# Altium PCB Analog_readout_v2.PcbDoc
Units mm, origin at the board's own origin, x right, y up, seen from the top; angles counter-clockwise.
Board outline 82.42 x 81.05 mm, 2 copper layers (Top Layer, Bottom Layer); 87 components, 48 nets, 227 pads, 13 vias.
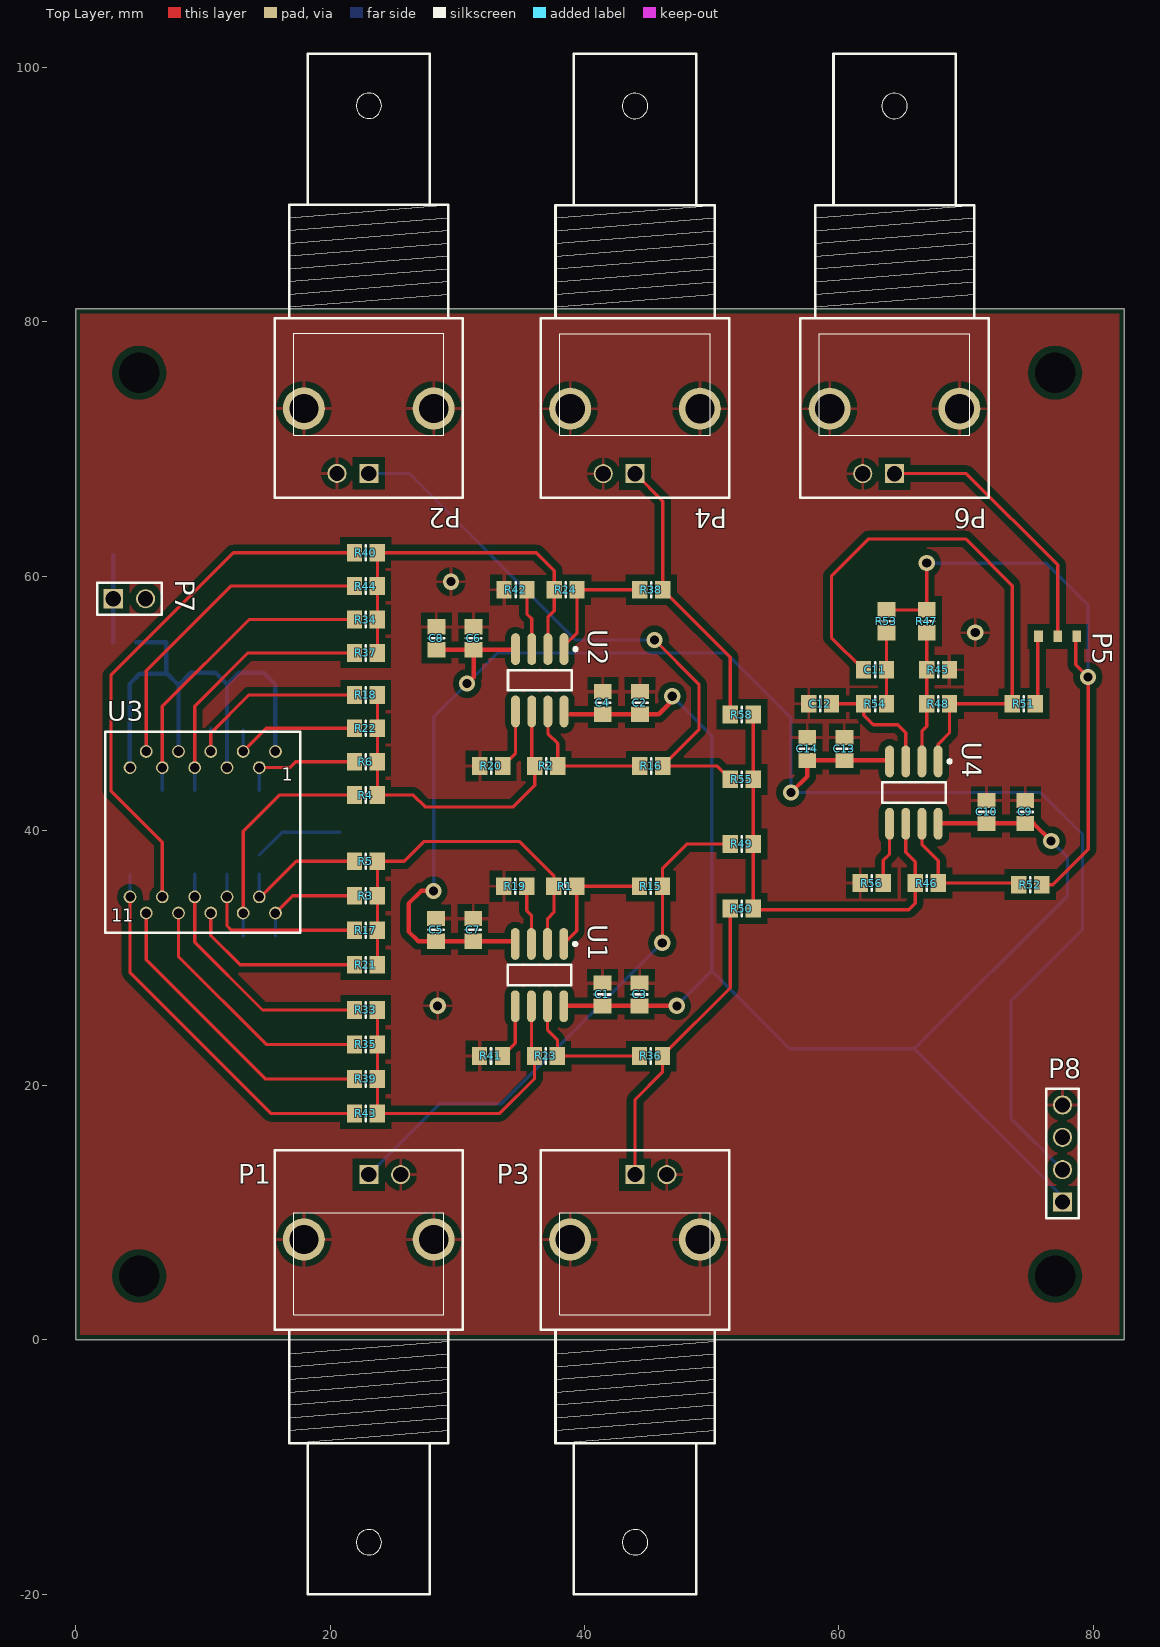
[diagram p0: Top Layer view]
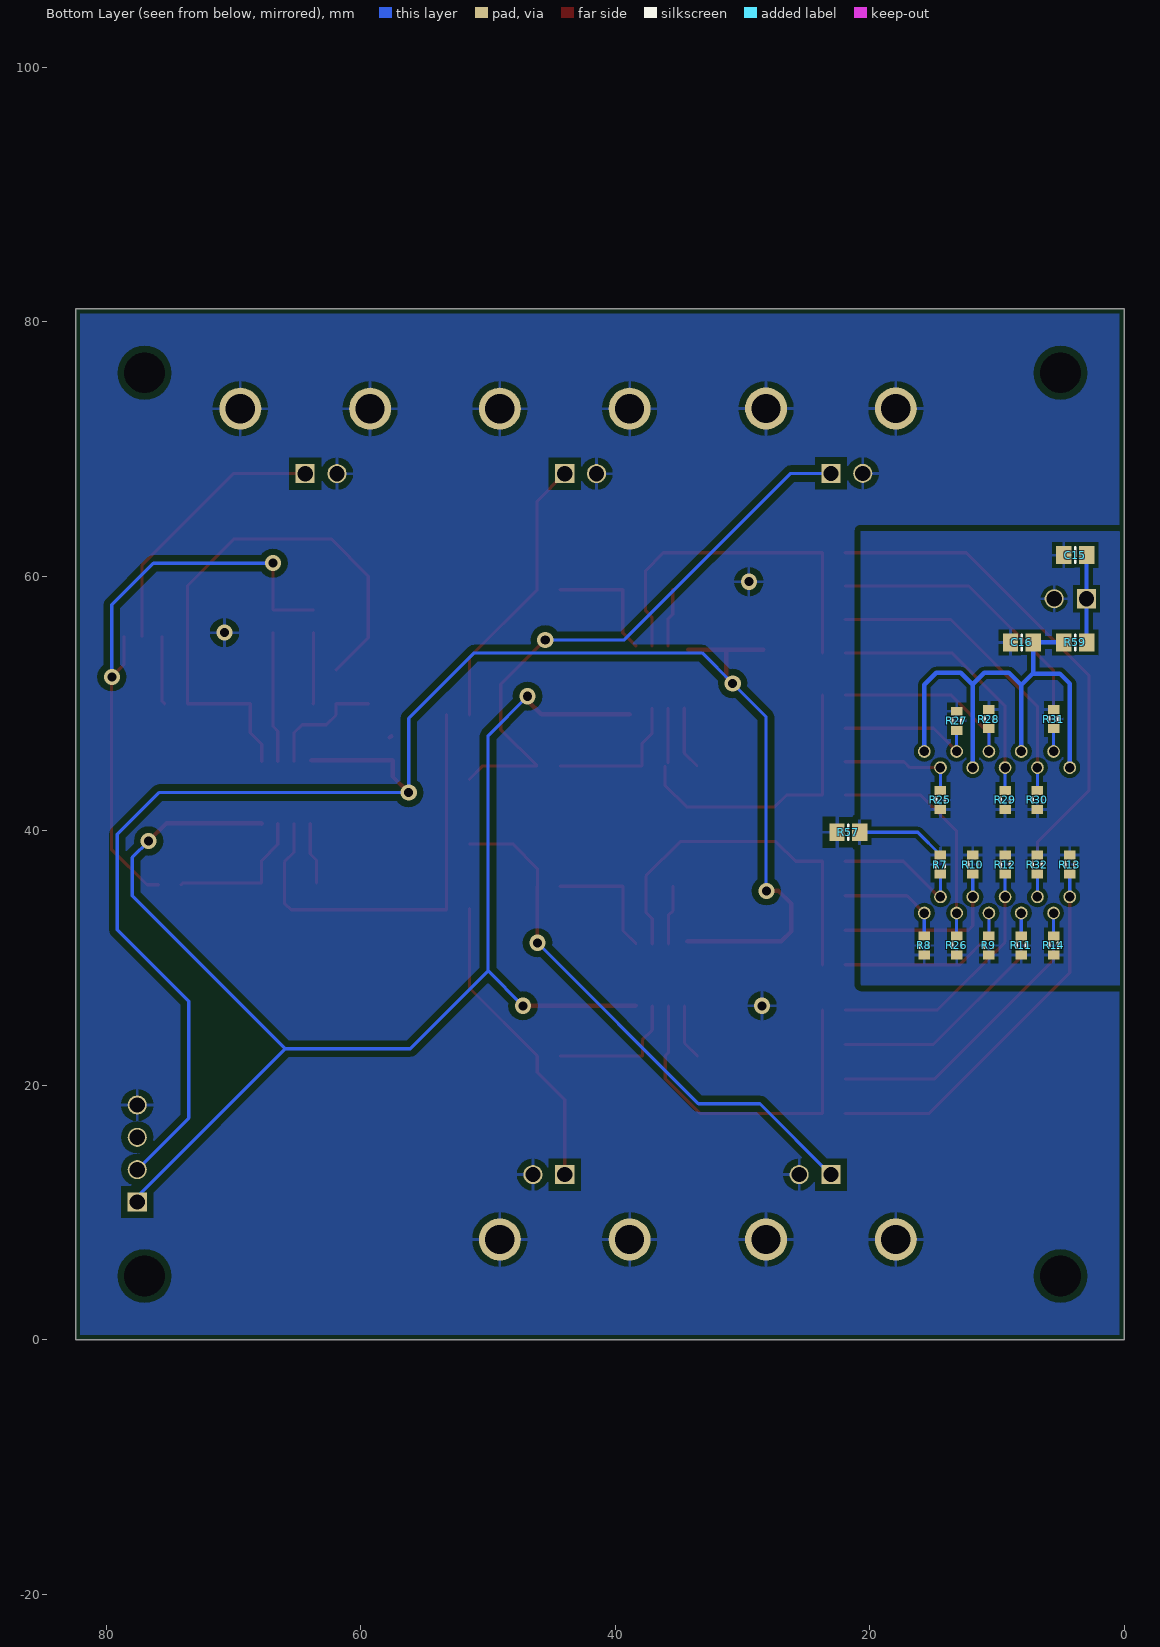
[diagram p1: Bottom Layer view, seen from below]

## Layer stack, top to bottom
Top Layer: signal copper 0.0356
Dielectric: dielectric 0.32, FR-4, Dk 4.8
Bottom Layer: signal copper 0.0356

## Board outline
0,0 0,81.05 82.425,81.05 82.425,0

## Design rules (kind name [scope] priority, off if disabled: settings)
Clearance Clearance_4 [InNamedPolygon('gnd_29') vs InNamedPolygon('gnd_bot')] p1: gap=0.5
Clearance Clearance_3 [InNamedPolygon('gnd_29')] p2: gap=0.3
Clearance Clearance_2 [InNamedPolygon('gnd_top')] p3: gap=0.5
Clearance Clearance_1 [InNamedPolygon('gnd_bot')] p4: gap=0.5
Clearance [All] p5: gap=0.254
HoleToHoleClearance [All] p1: gap=0.127 allowstackedmicrovias=TRUE
MinimumSolderMaskSliver MinimumSolderMaskSliver_1 [(InComponent('U3') OR InComponentClass('Bottom Side Components'))] p1: minsoldermaskwidth=0.05
MinimumSolderMaskSliver [All] p2: minsoldermaskwidth=0.254
PolygonConnect [All] p1: connectstyle=Relief reliefconductorwidth=0.254 reliefentries=4 polygonreliefangle="90 Angle"
RoutingVias [All] p1: holewidth=0.711 width=1.27 viastyle="Through Hole" minholewidth=0.711 minwidth=1.27 maxholewidth=0.711 maxwidth=1.27
SilkscreenOverComponentPads [All] p1: minsilkscreentomaskgap=0.254
SolderMaskExpansion SolderMaskExpansion_1 [(InComponent('U3') OR InComponentClass('Bottom Side Components'))] p1: expansion=0.05
SolderMaskExpansion [All] p2: expansion=0.102
Width Width_1 [(InNet('+29V') OR InNet('-5') OR InNet('+5') OR InNet('29_GND') OR InNet('GND')OR InNet('+29'))] p1: maxlimit=0.35 minlimit=0.254 preferedwidth=0.35 toplayer_minwidth=0.35 minimp=50.000000 maximp=50.000000 favimp=50.000000
Width [All] p2: maxlimit=0.254 minlimit=0.254 preferedwidth=0.254
25 further rules are at their usual default settings.

## Components (designator, comment, footprint, x,y, rotation, side; value= is the part's Value field where it differs from the comment)
C1 "Cap" 6-0805_N 41.417,27.132 r270 top
C2 "Cap" 6-0805_N 44.363,50.054 r270 top
C3 "Cap Pol3" 6-0805_N 44.338,27.132 r90 top
C4 "Cap Pol3" 6-0805_N 41.442,50.054 r90 top
C5 "Cap" 6-0805_N 28.336,32.212 r270 top
C6 "Cap" 6-0805_N 31.282,55.134 r270 top
C7 "Cap Pol3" 6-0805_N 31.257,32.212 r270 top
C8 "Cap Pol3" 6-0805_N 28.361,55.134 r270 top
C9 "Cap" 6-0805_N 74.654,41.478 r270 top
C10 "Cap Pol3" 6-0805_N 71.606,41.478 r90 top
C11 "Cap" 6-0805_N 62.843,52.654 r180 top
C12 "Cap" 6-0805_N 58.525,49.987 r180 top
C13 "Cap" 6-0805_N 60.43,46.431 r270 top
C14 "Cap Pol3" 6-0805_N 57.509,46.431 r270 top
C15 "Cap" 6-0805_N 3.851,61.666 r180 bottom
C16 "Cap" 6-0805_N 8.042,54.808 r180 bottom
P1 "BNC" "BNC_RA CON" 23.05,12.975 r90 top
P2 "BNC" "BNC_RA CON" 23.05,68.092 r270 top
P3 "BNC" "BNC_RA CON" 43.975,12.975 r90 top
P4 "BNC" "BNC_RA CON" 43.975,68.075 r270 top
P5 "SwitchSMD_3" SwitchSMD_0603 77.2,55.275 r0 top
P6 "BNC" "BNC_RA CON" 64.375,68.075 r270 top
P7 "Header 2" HDR1X2 2.962,58.237 r0 top
P8 "Header 4" HDR1X4 77.575,10.825 r90 top
R1 "Res3" 6-0805_N 38.496,35.641 r0 top
R2 "Res3" 6-0805_N 36.997,45.101 r0 top
R3 "Res3" 6-0805_N 22.823,34.89 r0 top
R4 "Res3" 6-0805_N 22.823,42.806 r0 top
R5 "Res3" 6-0805_N 22.823,37.599 r0 top
R6 "Res3" 6-0805_N 22.823,45.431 r0 top
R7 "Res3" J1-0603 14.441,37.345 r270 bottom
R8 "Res3" J1-0603 15.711,30.995 r90 bottom
R9 "Res3" J1-0603 10.631,30.995 r90 bottom
R10 "Res3" J1-0603 11.901,37.345 r270 bottom
R11 "Res3" J1-0603 8.091,30.995 r90 bottom
R12 "Res3" J1-0603 9.361,37.345 r270 bottom
R13 "Res3" J1-0603 4.281,37.345 r270 bottom
R14 "Res3" J1-0603 5.551,30.995 r90 bottom
R15 "Res3" 6-0805_N 45.227,35.641 r0 top
R16 "Res3" 6-0805_N 45.252,45.101 r0 top
R17 "Res3" 6-0805_N 22.823,32.18 r0 top
R18 "Res3" 6-0805_N 22.823,50.68 r0 top
R19 "Res3" 6-0805_N 34.559,35.641 r0 top
R20 "Res3" 6-0805_N 32.679,45.101 r0 top
R21 "Res3" 6-0805_N 22.823,29.471 r0 top
R22 "Res3" 6-0805_N 22.823,48.055 r0 top
R23 "Res3" 6-0805_N 36.972,22.306 r0 top
R24 "Res3" 6-0805_N 38.521,58.944 r0 top
R25 "Res3" J1-0603 14.441,42.425 r90 bottom
R26 "Res3" J1-0603 13.171,30.995 r90 bottom
R27 "Res3" J1-0603 13.171,48.648 r270 bottom
R28 "Res3" J1-0603 10.631,48.775 r270 bottom
R29 "Res3" J1-0603 9.361,42.425 r90 bottom
R30 "Res3" J1-0603 6.821,42.425 r90 bottom
R31 "Res3" J1-0603 5.551,48.775 r270 bottom
R32 "Res3" J1-0603 6.821,37.345 r270 bottom
R33 "Res3" 6-0805_N 22.823,25.915 r0 top
R34 "Res3" 6-0805_N 22.823,56.607 r0 top
R35 "Res3" 6-0805_N 22.823,23.206 r0 top
R36 "Res3" 6-0805_N 45.227,22.306 r0 top
R37 "Res3" 6-0805_N 22.823,53.982 r0 top
R38 "Res3" 6-0805_N 45.252,58.944 r0 top
R39 "Res3" 6-0805_N 22.823,20.496 r0 top
R40 "Res3" 6-0805_N 22.823,61.856 r0 top
R41 "Res3" 6-0805_N 32.654,22.306 r0 top
R42 "Res3" 6-0805_N 34.584,58.944 r0 top
R43 "Res3" 6-0805_N 22.823,17.787 r0 top
R44 "Res3" 6-0805_N 22.823,59.231 r0 top
R45 "Res3" 6-0805_N 67.796,52.654 r0 top
R46 "Res3" 6-0805_N 66.907,35.89 r0 top
R47 "Res3" 6-0805_N 66.907,56.464 r90 top
R48 "Res3" 6-0805_N 67.796,49.987 r180 top
R49 "Res3" 6-0805_N 52.363,38.969 r0 top
R50 "Res3" 6-0805_N 52.363,33.889 r0 top
R51 "Res3" 6-0805_N 74.527,49.987 r0 top
R52 "Res3" 6-0805_N 75.035,35.763 r0 top
R53 "Res3" 6-0805_N 63.732,56.464 r90 top
R54 "Res3" 6-0805_N 62.843,49.987 r0 top
R55 "Res3" 6-0805_N 52.363,44.049 r0 top
R56 "Res3" 6-0805_N 62.589,35.89 r0 top
R57 "Res3" 6-0805_N 21.68,39.885 r180 bottom
R58 "Res3" 6-0805_N 52.363,49.129 r0 top
R59 "Res3" 6-0805_N 3.851,54.808 r180 bottom
U1 "AD8002AR" SO-8_M 36.464,28.656 r270 top
U2 "AD8002AR" SO-8_M 36.489,51.832 r270 top
U3 "SPMArray4_Sensl" Sensl_PGA20P_v2 15.711,33.535 r0 top
U4 "THS4062" SO-8_M 65.891,43.002 r270 top

## Footprints (in the part's own frame and the unit in brackets; to place one, negate y for a bottom-side part, rotate by r counter-clockwise, add the part's x,y. Pads: shape width x height; smd on the part's side, far side on the other; paste and mask are expansions set on the pad)
6-0805_N [mm] "Chip Resistor, Body 2.0x1.2mm, IPC Medium Density"
  rect 1.2x1.4 smd: 1(-0.9,0) 2(0.9,0)
  silkscreen extent 0,-0.6 0,0.6, body extent -1.07,-0.7 1.07,0.7, height 0.7
"BNC_RA CON" [mm] "Connector; BNC Elbow"
  rect 1.5x1.5 hole 1.2: 1(0,0)
  round 3.3 hole 2.3: 2(-5.1,-5.1) 2(-5.1,5.1)
  round 1.5 hole 1.2: 2(0,-2.5)
  silkscreen extent -33,-7.4 1.9,7.4
HDR1X2 [mm] "Connector; Header; 2 Position"
  rect 1.5x1.5 hole 1.2: 1(0,0)
  round 1.5 hole 1.2: 2(2.54,0)
  silkscreen extent -1.27,-1.27 3.81,1.27
HDR1X4 [mm] "Connector; Header; 4 Position"
  rect 1.5x1.5 hole 1.2: 1(0,0)
  round 1.5 hole 1.2: 2(2.54,0) 3(5.08,0) 4(7.62,0)
  silkscreen extent -1.27,-1.27 8.89,1.27
J1-0603 [mm] "Chip Resistor, Body 1.6x0.8mm, IPC High Density"
  rect 0.7x0.9 smd: 1(-0.75,0) 2(0.75,0)
  silkscreen extent -0.2,-0.35 0.2,0.35, body extent -0.85,-0.48 0.85,0.48, height 0.9
Sensl_PGA20P_v2 [mm]
  round 1 hole 0.75: 1(0,12.7) 2(-1.27,11.43) 3(-2.54,12.7) 4(-3.81,11.43) 5(-5.08,12.7) 6(-6.35,11.43) 7(-7.62,12.7) 8(-8.89,11.43) 9(-10.16,12.7) 10(-11.43,11.43) 11(-11.43,1.27) 12(-10.16,0) 13(-8.89,1.27) 14(-7.62,0) 15(-6.35,1.27) 16(-5.08,0) 17(-3.81,1.27) 18(-2.54,0) 19(-1.27,1.27) 20(0,0)
  silkscreen extent -13.37,-1.55 1.94,14.25
SO-8_M [mm] "SOIC, 8-Leads, Body 4.9x3.9mm, Pitch 1.27mm, IPC Low Density"
  oval 2.5x0.7 smd: 1(-2.45,1.905) 2(-2.45,0.635) 3(-2.45,-0.635) 4(-2.45,-1.905) 5(2.45,-1.905) 6(2.45,-0.635) 7(2.45,0.635) 8(2.45,1.905)
  silkscreen extent -2.57,-2.5 0.8,2.93, body extent -2,-2.5 2,2.5, height 1.75
SwitchSMD_0603 [mm] "3 pins 0603"
  rect 0.7x0.9 smd: 1(-1.5,0) 2(1.5,0) 3(0,0)
  body extent -1.6,-0.48 1.6,0.48, height 0.9

## Part data
C1 C2 C5 C6 C9 C11 C12 C13 C15 C16: "Capacitor"
C3 C4 C7 C8 C10 C14: "Polarized Capacitor (Surface Mount)"
P1 P2 P3 P4 P6: "BNC Elbow Connector"
P7: "Header, 2-Pin"
P8: "Header, 4-Pin"
R1 R2 R3 R4 R5 R6 R7 R8 R9 R10 R11 R12 R13 R14 R15 R16 R17 R18 R19 R20 R21 R22 R23 R24 R25 R26 R27 R28 R29 R30 R31 R32 R33 R34 R35 R36 R37 R38 R39 R40 R41 R42 R43 R44 R45 R46 R47 R48 R49 R50 R51 R52 R53 R54 R55 R56 R57 R58 R59: "Resistor"
U1 U2: "Dual 600MHz, 50mW Current Feedback Amplifier"
U4: library part AD8002AR, "Dual 600MHz, 50mW Current Feedback Amplifier"

## Free pads (board coordinates)
  round 1.524 hole 3.2 unplated: T1(5,76) T2(77,76) T3(5,5) T4(77,5)

## Via types
v1: diameter 1.27, hole 0.711, Top Layer to Bottom Layer, 13 vias

## Nets (pads, with @x,y where several pads share a name; then routed paths per layer and width w, separated by ;. In a path a pad name is that pad's centre, name@x,y a point inside that pad or via, vN(x,y) a via of type N, cw(c..) or ccw(c..) an arc to the next point about the centre after c; other vN are vias at no path point)
29_GND: C15.1 C16.1 P7.2 R7.1 R8.1 R9.1 R10.1 R11.1 R12.1 R13.1 R14.1 R25.1 R26.1 R27.1 R28.1 R29.1 R30.1 R31.1 R32.1 R57.2 | length 7.1
  Bottom Layer w0.254: R7.1 16.231,39.885 R57.2
+5: C1.2 C2.2 C3.1 C4.1 C9.2 C10.1 P8.1 U1.8 U2.8 U4.8 | length 111.1
  Top Layer w0.35: U1.8@38.395,26.232 C1.2 C3.1 44.349,26.243 v1(47.259,26.243) ; 38.876,49.154 C4.1 C2.2 45.829,49.154 46.9,50.225 v1(46.9,50.575) ; U4.8 67.822,40.578 C9.2 75.3,40.578 v1(76.686,39.192)
  Bottom Layer w0.254: v1(46.9,50.575) 50.001,47.474 50.001,28.985 ; v1(47.259,26.243) 50.001,28.985 ; 65.925,22.867 56.119,22.867 50.001,28.985 ; v1(76.686,39.192) 77.975,37.903 77.975,34.9 65.934,22.858 77.575,11.217 P8.1
+29: C15.2 P7.1 R59.2 | length 6.8
  Bottom Layer w0.35: R59.2@2.962,54.819 P7.1 C15.2@2.962,61.655
+29V: C16.2 R59.1 U3.1 U3.4 U3.7 U3.10 | length 42.2
  Bottom Layer w0.35: U3.10@4.27,44.976 4.27,51.57 5.05,52.35 7.2,52.35 ; R59.1 C16.2 7.142,52.408 7.2,52.35 ; U3.7 8.091,51.459 ; U3.4 11.901,51.524 ; U3.1 15.711,51.489 14.775,52.425 12.85,52.425 11.949,51.524 11.901,51.524 ; 7.2,52.35 8.091,51.459 ; 8.091,51.459 9.057,52.425 11,52.425 11.901,51.524
-5: C5.2 C6.2 C7.2 C8.2 C13.2 C14.2 P8.2 U1.4 U2.4 U4.4 | length 138.5
  Top Layer w0.35: v1(28.125,35.275) 27.175,35.275 26.177,34.277 26.177,32.085 26.95,31.312 C5.2 C7.2 U1.4@34.353,31.312 ; C8.2 C6.2 ; v1(30.774,51.578) 31.282,52.086 C6.2 ; U2.4@34.282,54.234 C6.2 ; v1(56.239,43.002) 57.509,44.272 C14.2 C13.2 U4.4@63.907,45.531
  Bottom Layer w0.254: v1@28.157,34.805 28.157,48.961 v1(30.774,51.578) ; v1@30.774,51.832 v1(30.774,51.578) ; P8.2 73.525,17.415 73.525,26.6 79.15,32.225 79.15,39.725 75.873,43.002 v1(56.239,43.002) 56.239,48.836 51.093,53.982 33.178,53.982 v1(30.774,51.578)
GND: C1.1 C2.1 C3.2 C4.2 C5.1 C6.1 C7.1 C8.1 C9.1 C10.2 C12.2 C13.1 C14.1 P1.2 P2.2 P3.2 P4.2 P6.2 P8.4 R19.1 R20.1 R41.1 R42.1 R45.2 R56.1 R57.1 | length 0.2
  Top Layer w0.35: C14.1@57.625,47.447 C14.1@57.741,47.331
  other v1: 28.463,26.243 70.717,55.575 29.504,59.579
NetC11_1: C11.1 R53.1 R54.2 | length 5.6
  Top Layer w0.254: R53.1 63.732,49.998 R54.2
NetC11_2: C11.2 R48.1 R51.1 U4.1 | length 44.5
  Top Layer w0.254: C11.2 59.414,55.183 59.414,60.02 62.335,62.941 69.955,62.941 73.627,59.269 R51.1 R48.1 68.696,47.712 67.796,46.812 U4.1
NetC12_1: C12.1 R54.1 U4.3 | length 9.5
  Top Layer w0.254: C12.1 R54.1 61.954,49.976 61.954,49.098 62.716,48.336 64.621,48.336 65.256,47.701 U4.3
NetP1_1: P1.1 R15.2 R49.1 | length 42.6
  Top Layer w0.254: v1(46.116,31.196) 46.127,31.207 R15.2 ; R15.2@46.125,35.625 46.125,37.025 48.069,38.969 R49.1
  Bottom Layer w0.254: P1.1 28.625,18.55 33.47,18.55 v1(46.116,31.196)
NetP2_1: P2.1 R16.2 R55.1 | length 46.2
  Top Layer w0.254: v1(45.506,55.007) 49,51.513 49,47.949 R16.2 50.411,45.101 R55.1
  Bottom Layer w0.254: P2.1 26.208,68.092 39.293,55.007 v1(45.506,55.007)
NetP3_1: P3.1 R36.2 R50.1 | length 24
  Top Layer w0.254: P3.1 43.975,18.875 46.127,21.027 R36.2 51.463,27.642 R50.1
NetP4_1: P4.1 R38.2 R58.1 | length 22.1
  Top Layer w0.254: P4.1@43.975,68.092 46.152,65.915 R38.2 51.463,53.633 R58.1
NetP5_1: P5.1 R51.2 | length 5.4
  Top Layer w0.254: R51.2 75.625,50.185 P5.1@75.625,55.275
NetP5_2: P5.2 R47.2 R52.2 R53.2 | length 48.5
  Top Layer w0.254: R53.2 R47.2 v1(66.907,61.036) ; R52.2 76.813,35.763 79.607,38.557 79.607,52.068 v1(79.575,52.1) 78.625,53.05 P5.2@78.625,55.275
  Bottom Layer w0.254: v1(66.907,61.036) 76.305,61.036 79.575,57.766 v1(79.575,52.1)
NetP5_3: P5.3 P6.1 | length 21.4
  Top Layer w0.254: P6.1 70.025,68.075 77.2,60.9 P5.3
NetR1_1: R1.1 R3.2 R5.2 R17.2 R21.2 U1.2 | length 29.3
  Top Layer w0.254: R21.2 R17.2 R3.2 R5.2 25.824,37.599 27.375,39.15 34.9,39.15 37.596,36.454 R1.1 37.596,33.598 37.099,33.101 U1.2
NetR1_2: R1.2 R15.1 U1.1 | length 9.9
  Top Layer w0.254: U1.1 39.396,32.133 R1.2 R15.1
NetR2_1: R2.1 R4.2 R6.2 R18.2 R22.2 U2.6 | length 27.2
  Top Layer w0.254: R18.2 R22.2 R6.2 R4.2 26.544,42.806 27.475,41.875 34.4,41.875 36.097,43.572 R2.1 ; R2.1@35.854,45.344 U2.6 U2.6@35.854,49.636
NetR2_2: R2.2 R16.1 U2.7 | length 11.3
  Top Layer w0.254: U2.7@37.124,49.636 37.124,47.641 37.897,46.868 R2.2 R16.1
NetR3_1: R3.1 R8.2 U3.20 | length 8.6
  Top Layer w0.254: U3.20 17.066,34.89 R3.1
  Bottom Layer w0.254: R8.2 U3.20
NetR4_1: R4.1 R26.2 U3.18 | length 18.2
  Top Layer w0.254: U3.18 13.171,39.971 16.006,42.806 R4.1
  Bottom Layer w0.254: R26.2 U3.18
NetR5_1: R5.1 R7.2 U3.19 | length 10.4
  Top Layer w0.254: U3.19 14.568,34.805 17.362,37.599 R5.1
  Bottom Layer w0.254: U3.19 R7.2
NetR6_1: R6.1 R25.2 U3.2 | length 9.5
  Top Layer w0.254: U3.2 16.84,44.965 17.306,45.431 R6.1
  Bottom Layer w0.254: R25.2 U3.2
NetR9_2: R9.2 R21.1 U3.16 | length 15.8
  Top Layer w0.254: U3.16 10.631,31.769 12.929,29.471 R21.1
  Bottom Layer w0.254: R9.2 U3.16
NetR10_2: R10.2 R17.1 U3.17 | length 14.2
  Top Layer w0.254: U3.17 11.901,32.519 12.24,32.18 R17.1
  Bottom Layer w0.254: U3.17 R10.2
NetR11_2: R11.2 R35.1 U3.14 | length 21.9
  Top Layer w0.254: U3.14 8.091,30.106 14.991,23.206 R35.1
  Bottom Layer w0.254: R11.2 U3.14
NetR12_2: R12.2 R33.1 U3.15 | length 20.1
  Top Layer w0.254: U3.15 9.361,31.249 14.695,25.915 R33.1
  Bottom Layer w0.254: U3.15 R12.2
NetR13_2: R13.2 R43.1 U3.11 | length 30
  Top Layer w0.254: U3.11 4.281,28.836 15.33,17.787 R43.1
  Bottom Layer w0.254: U3.11 R13.2
NetR14_2: R14.2 R39.1 U3.12 | length 25.7
  Top Layer w0.254: U3.12 5.551,29.852 14.907,20.496 R39.1
  Bottom Layer w0.254: R14.2 U3.12
NetR18_1: R18.1 R28.2 U3.5 | length 15.8
  Top Layer w0.254: U3.5 10.631,47.681 13.63,50.68 R18.1
  Bottom Layer w0.254: U3.5 R28.2
NetR19_2: R19.2 U1.3 | length 4.7
  Top Layer w0.254: R19.2 35.459,33.725 35.829,33.355 U1.3
NetR20_2: R20.2 U2.5 | length 5
  Top Layer w0.254: R20.2 34.584,46.106 U2.5@34.584,49.636
NetR22_1: R22.1 R27.2 U3.3 | length 11.2
  Top Layer w0.254: U3.3 14.991,48.055 R22.1
  Bottom Layer w0.254: U3.3 R27.2
NetR23_1: R23.1 R33.2 R35.2 R39.2 R43.2 U1.6 | length 27.4
  Top Layer w0.254: R33.2 R35.2 R39.2 R43.2 33.353,17.787 36.072,20.506 R23.1 35.829,22.549 U1.6
NetR23_2: R23.2 R36.1 U1.7 | length 10.7
  Top Layer w0.254: U1.7 37.099,24.338 37.872,23.565 R23.2 R36.1
NetR24_1: R24.1 R34.2 R37.2 R40.2 R44.2 U2.2 | length 28.5
  Top Layer w0.254: R37.2 R34.2 R44.2 R40.2 36.219,61.856 37.621,60.454 R24.1 37.621,57.282 37.124,56.785 U2.2@37.124,54.536
NetR24_2: R24.2 R38.1 U2.1 | length 9.8
  Top Layer w0.254: U2.1@38.394,54.536 39.421,55.563 R24.2 R38.1
NetR29_2: R29.2 R37.1 U3.6 | length 20.9
  Top Layer w0.254: U3.6 9.361,49.791 13.552,53.982 R37.1
  Bottom Layer w0.254: R29.2 U3.6
NetR30_2: R30.2 R34.1 U3.8 | length 24.5
  Top Layer w0.254: U3.8 6.821,49.791 13.637,56.607 R34.1
  Bottom Layer w0.254: R30.2 U3.8
NetR31_2: R31.2 R44.1 U3.9 | length 27.3
  Top Layer w0.254: U3.9 5.551,52.585 12.197,59.231 R44.1
  Bottom Layer w0.254: U3.9 R31.2
NetR32_2: R32.2 R40.1 U3.13 | length 44
  Top Layer w0.254: U3.13 6.821,39.104 2.775,43.15 2.775,52.222 12.409,61.856 R40.1
  Bottom Layer w0.254: U3.13 R32.2
NetR41_2: R41.2 U1.5 | length 4.3
  Top Layer w0.254: R41.2 34.559,23.311 U1.5
NetR42_2: R42.2 U2.3 | length 4.6
  Top Layer w0.254: R42.2 35.484,57.028 35.854,56.658 U2.3@35.854,54.536
NetR45_1: R45.1 R47.1 R48.2 U4.2 | length 10.3
  Top Layer w0.254: U4.2 66.526,47.828 66.907,48.209 R47.1
NetR46_1: R46.1 R49.2 R50.2 R55.2 R58.2 U4.6 | length 34.8
  Top Layer w0.254: R50.2@53.263,33.789 65.489,33.789 66.007,34.307 R46.1 66.007,37.552 65.256,38.303 U4.6 ; R50.2 R49.2 R55.2 R58.2
NetR46_2: R46.2 R52.1 U4.7 | length 11.6
  Top Layer w0.254: U4.7 66.526,38.938 67.807,37.657 R46.2 74.008,35.89 R52.1
NetR56_2: R56.2 U4.5 | length 4.9
  Top Layer w0.254: R56.2 63.489,37.679 63.986,38.176 U4.5
pads on no net: P8.3

## Polygon pours and split planes (outlines as drawn)
29_GND on Bottom Layer "gnd_29" (solid, remove dead copper, pour order 5): 0.374,63.55 0.35,63.525 0.35,27.875 20.653,27.875 20.725,27.95 20.725,63.55
GND on Bottom Layer "gnd_bot" (solid, remove dead copper, pour order 7): 0.375,0.375 82.05,0.375 82.05,80.625 0.375,80.625
GND on Top Layer "gnd_top" (solid, remove dead copper, pour order 6): 0.375,80.625 82.05,80.625 82.05,0.375 0.375,0.375 0.375,80.625

## Silkscreen, mask and mechanical layers (free items; w line width, h text height)
Drill Drawing:
  the board outline again, w0.254

## Text inside footprints (layer, text, board x,y; h text height)
U3: Top Overlay "1" at 16.224,43.923 h1; Top Overlay "11" at 2.811,32.848 h1